# EAGLE board greytak basic lab instrument idea (EAGLE 9.7.0)

Size 231.65 x 174.82 mm. Coordinates in mm from the lower left corner, seen from the top.
Outline: 0,0 231.65,0 231.65,174.82 0,174.82 0,0
Copper layers (1*16): Top 0.035mm / dielectric 1.5mm / Bottom 0.035mm
Design rules "default": minimum track width 6mil, minimum drill 0.35mm, track to track 6mil, track to pad 6mil, pad to pad 6mil, via to via 6mil, smd to smd 6mil, copper to edge 40mil, drill to drill 6mil, minimum pad ring 10mil, minimum via ring 8mil, stop-mask expansion 4mil, vias tented up to drill 0mil, thermal gap 10mil

## Footprints (pad centres in the part's own frame; a part is rotated, then mirrored left to right if it is on the bottom)
LEDRD254W60D565H860B_G = drill 0.981 pad 1.581: 1 -1.27,0; 2 1.27,0
1X08 = drill 1.016 long: 1 -8.89,0; 2 -6.35,0; 3 -3.81,0; 4 -1.27,0; 5 1.27,0; 6 3.81,0; 7 6.35,0; 8 8.89,0
RESAD1016W63L850D250B = drill 0.83 pad 1.43: 1 -5.08,0; 2 5.08,0
HA-06-SM065 = drill 1 pad 1.676: 1 -2.54,-2.54; 2 0,2.54; 3 2.54,-2.54
SWITCH-MOMENTARY-PTH-6.5MM = drill 1.016 pad 1.88: 1 -3.251,2.261; 2 3.251,2.261; 3 -3.251,-2.261; 4 3.251,-2.261
SWITCH-SPDT-PTH-8.5X3.7MM = drill 1.016 pad 1.88: 1 -2.54,0; 2 0,0; 3 2.54,0
ARDUINO-UNO-R3-SHIELD = drill 1.016 pad 1.88: 3.3V 24.13,-2.54; 5V 24.13,0; A0 24.13,12.7; A1 24.13,15.24; A2 24.13,17.78; A3 24.13,20.32; A4 24.13,22.86; A5 24.13,25.4; AREF -24.13,-13.97; D2 -24.13,20.32; D3 -24.13,17.78; D4 -24.13,15.24; D5 -24.13,12.7; D6 -24.13,10.16; D7 -24.13,7.62; D8 -24.13,3.81; D9 -24.13,1.27; D10 -24.13,-1.27; D11 -24.13,-3.81; D12 -24.13,-6.35; D13 -24.13,-8.89; GND@0 24.13,2.54; GND@1 24.13,5.08; GND@2 -24.13,-11.43; IOREF 24.13,-7.62; NC 24.13,-10.16; RES 24.13,-5.08; RX -24.13,25.4; SCL -24.13,-19.05; SDA -24.13,-16.51; TX -24.13,22.86; VIN 24.13,7.62
JHD-162A = drill 1.016 long: 1 -19.05,0; 2 -16.51,0; 3 -13.97,0; 4 -11.43,0; 5 -8.89,0; 6 -6.35,0; 7 -3.81,0; 8 -1.27,0; 9 1.27,0; 10 3.81,0; 11 6.35,0; 12 8.89,0; 13 11.43,0; 14 13.97,0; 15 16.51,0; 16 19.05,0

## Placement (x,y rotation side)
D1  GREEN  [LEDRD254W60D565H860B_G]  216.21,109.76 180 top
JP1  PINHD-1X08_1X08M  [1X08]  102.78,64.44 180 top
JP2  PINHD-1X08_1X08M  [1X08]  165.41,114.84 180 top
JP3  PINHD-1X08_1X08M  [1X08]  165.41,89.44 180 top
R2  550  [RESAD1016W63L850D250B]  109.13,49.2 90 top
R3  220  [RESAD1016W63L850D250B]  221.88,109.76 30 top
RPOT2  250k  [HA-06-SM065]  73.57,64.44 0 top
SDECR  SWITCH_MOMENTARY  [SWITCH-MOMENTARY-PTH-6.5MM]  189.54,103.41 90 top
SINCR  SWITCH_MOMENTARY  [SWITCH-MOMENTARY-PTH-6.5MM]  179.38,103.41 90 top
SLIMIT_SWITCH_OR_SENSOR_INPUT  SWITCH_MOMENTARY  [SWITCH-MOMENTARY-PTH-6.5MM]  168.18,145.46 90 top
SMODE_SWITCH:_AUTO/MANUAL  TOGGLE  [SWITCH-SPDT-PTH-8.5X3.7MM]  156.46,144.78 0 top
SNEXT/START  SWITCH_MOMENTARY  [SWITCH-MOMENTARY-PTH-6.5MM]  199.7,103.41 90 top
SSTOP/REZERO  SWITCH_MOMENTARY  [SWITCH-MOMENTARY-PTH-6.5MM]  209.86,103.41 90 top
U1  ARDUINO-UNO-R3-SHIELD  [ARDUINO-UNO-R3-SHIELD]  29.84,126.93 180 top
U3  LCD-16X2JHD-162A  [JHD-162A]  90.08,36.63 0 top

## Library data of the parts
D1 = Tinkercad; CATEGORY: Opto-Electronic; SUB-CATEGORY: LED; VALUE: LED_GREEN
JP1-JP3 R2 R3 RPOT2 SDECR SINCR SLIMIT_SWITCH_OR_SENSOR_INPUT SMODE_SWITCH:_AUTO/MANUAL SNEXT/START SSTOP/REZERO U1 U3 = Tinkercad

## Nets
D1_A: D1.1 R3.1
U1_5V: JP1.2 JP2.2 JP3.2 U1.5V
U1_A0: JP2.3 JP3.3 SINCR.1 SINCR.2 U1.A0
U1_A1: JP2.4 JP3.4 SDECR.1 SDECR.2 U1.A1
U1_A2: JP2.5 JP3.5 SNEXT/START.1 SNEXT/START.2 U1.A2
U1_A3: JP2.6 JP3.6 SSTOP/REZERO.1 SSTOP/REZERO.2 U1.A3
U1_A4: JP2.7 JP3.7 SLIMIT_SWITCH_OR_SENSOR_INPUT.3 U1.A4
U1_A5: JP2.8 JP3.8 SMODE_SWITCH:_AUTO/MANUAL.2 U1.A5
U1_D2: JP1.8 U1.D2
U1_D3: JP1.7 U1.D3
U1_D4: JP1.6 U1.D4
U1_D5: JP1.5 U1.D5
U1_D6: JP1.4 U1.D6
U1_D7: JP1.3 U1.D7
U1_D13: R3.2 U1.D13
U1_GND: D1.2 JP1.1 JP2.1 JP3.1 SDECR.3 SDECR.4 SINCR.3 SINCR.4 SLIMIT_SWITCH_OR_SENSOR_INPUT.1 SMODE_SWITCH:_AUTO/MANUAL.1 SNEXT/START.3 SNEXT/START.4 SSTOP/REZERO.3 SSTOP/REZERO.4 U1.GND@0 U1.GND@1 U1.GND@2
U3_GND: R2.1 RPOT2.1 U3.1 U3.15 U3.16
U3_VCC: R2.2 RPOT2.3 U3.2 U3.5
U3_VO: RPOT2.2 U3.3

## Tracks (layer width: path | path; a pad name or v marks a point on that pad's centre or on a via)
D1_A  (1 unrouted)
U1_5V  (3 unrouted)
U1_A0  (4 unrouted)
U1_A1  (4 unrouted)
U1_A2  (4 unrouted)
U1_A3  (4 unrouted)
U1_A4  (3 unrouted)
U1_A5  (3 unrouted)
U1_D2  (1 unrouted)
U1_D3  (1 unrouted)
U1_D4  (1 unrouted)
U1_D5  (1 unrouted)
U1_D6  (1 unrouted)
U1_D7  (1 unrouted)
U1_D13  (1 unrouted)
U1_GND  (16 unrouted)
U3_GND  (4 unrouted)
U3_VCC  (3 unrouted)
U3_VO  (1 unrouted)